# Altium PCB MiniHeating.PcbDoc
Units mil, origin at the board's own origin, x right, y up, seen from the top; angles counter-clockwise.
Board outline 2165.35 x 1732.28 mil, 2 copper layers (Top Layer, Bottom Layer); 63 components, 63 nets, 241 pads, 65 vias.
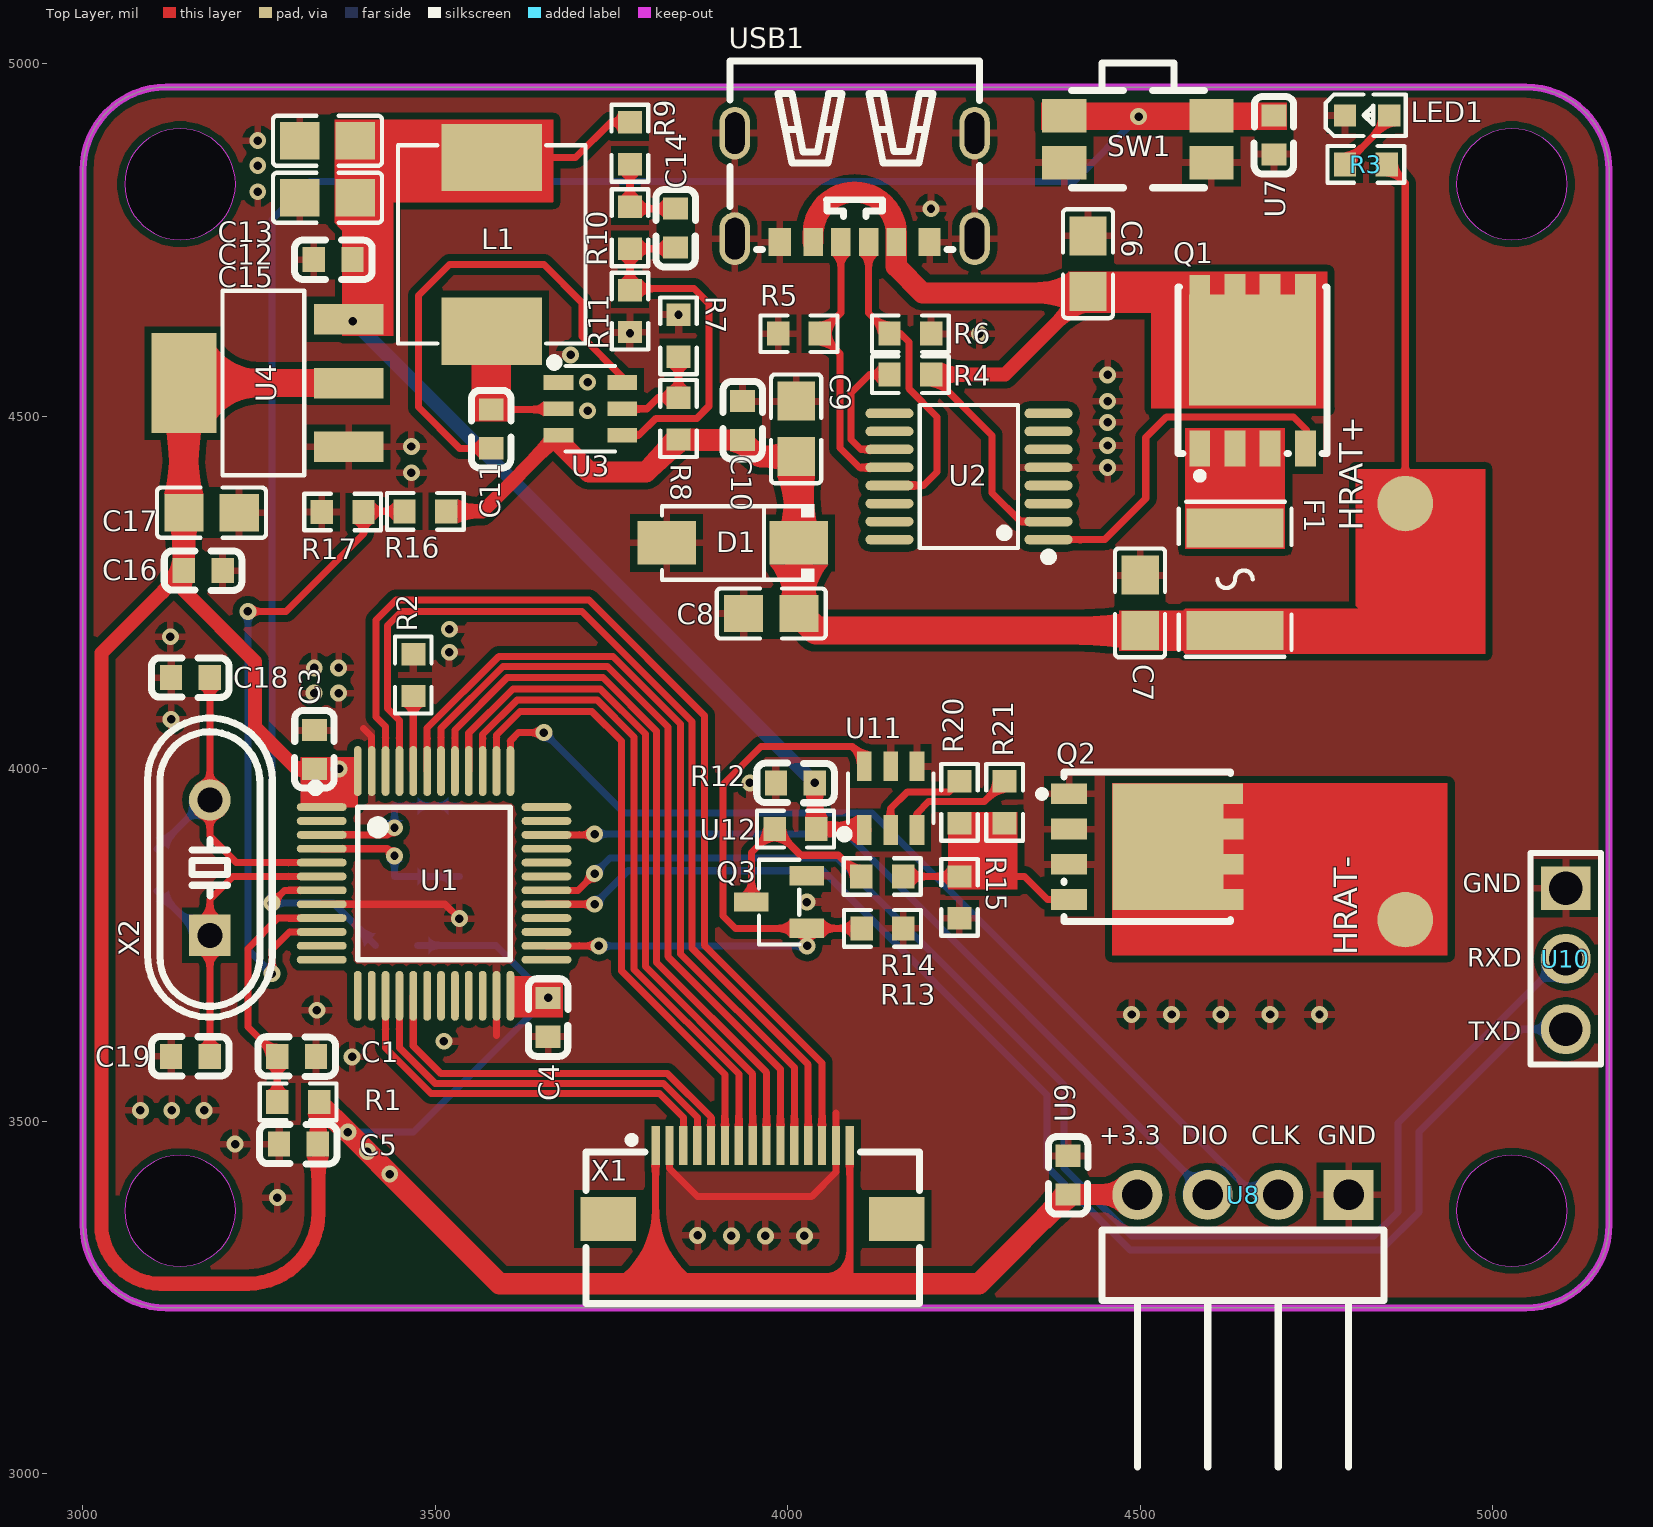
[diagram p0: Top Layer view]
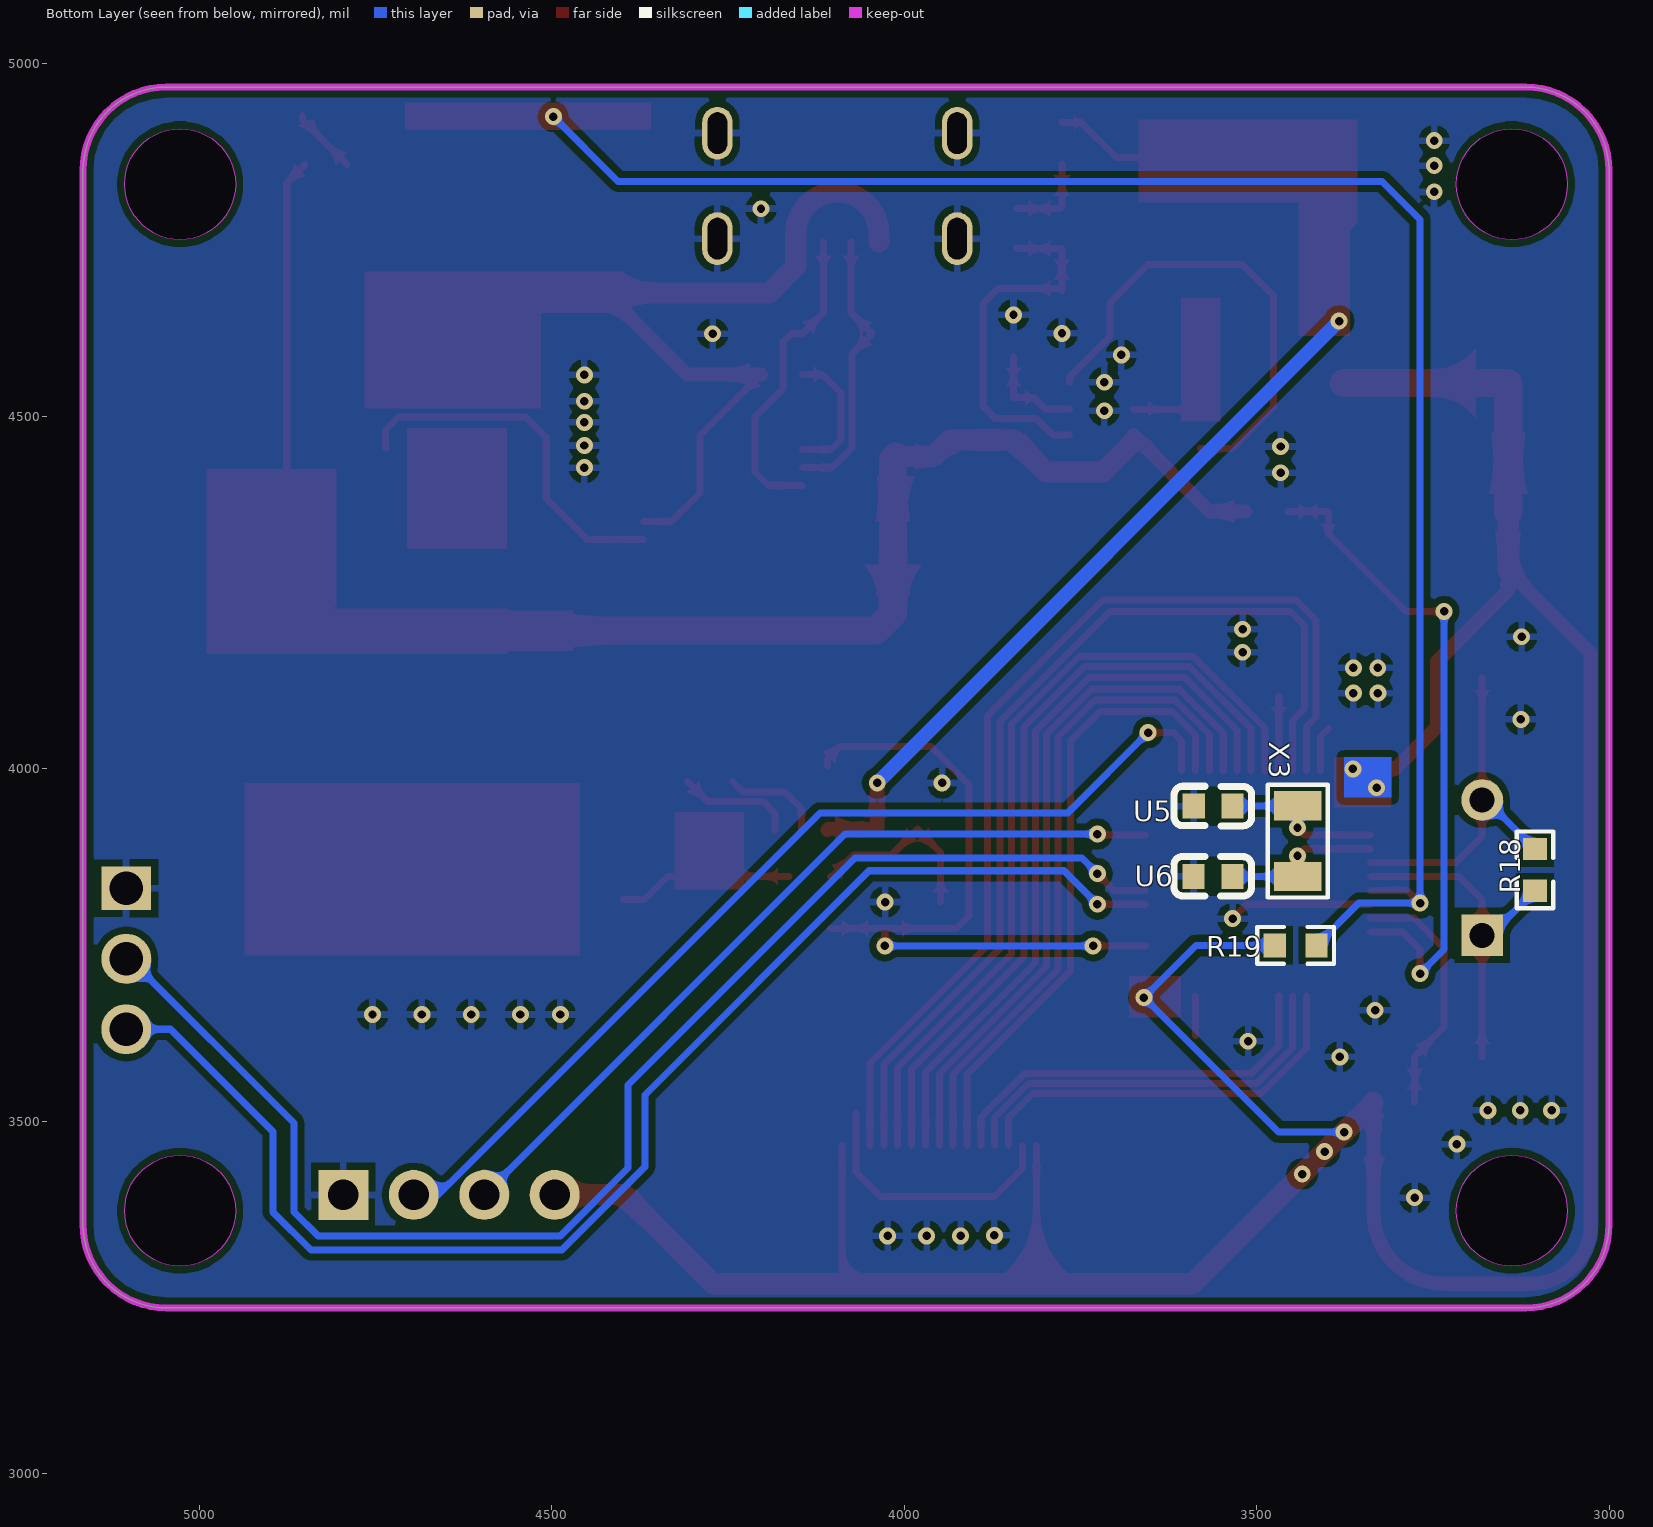
[diagram p1: Bottom Layer view, seen from below]

## Layer stack, top to bottom
Top Solder Mask Layer: solder mask 0.4, Solder Resist, Dk 3.5
Top Layer: signal copper 1.4
Dielectric1: dielectric 12.6, FR-4, Dk 4.8
Bottom Layer: signal copper 1.4
Bottom Solder Mask Layer: solder mask 0.4, Solder Resist, Dk 3.5

## Board outline
3000,3353.1 3000,4849.17 cw(c3118.11,4849.17) 3118.11,4967.28 5047.24,4967.28 cw(c5047.24,4849.17) 5165.35,4849.17 5165.35,3353.1 cw(c5047.24,3353.1) 5047.24,3234.99 3118.11,3234.99 cw(c3118.11,3353.1)
cut-out: 3216.54,4829.48 ccw(c3137.8,4829.48) 3059.06,4829.48 ccw(c3137.8,4829.48) 3216.54,4829.48
cut-out: 5106.3,4829.48 ccw(c5027.56,4829.48) 4948.82,4829.48 ccw(c5027.56,4829.48) 5106.3,4829.48
cut-out: 3216.54,3372.79 ccw(c3137.8,3372.79) 3059.06,3372.79 ccw(c3137.8,3372.79) 3216.54,3372.79
cut-out: 5106.3,3372.79 ccw(c5027.56,3372.79) 4948.82,3372.79 ccw(c5027.56,3372.79) 5106.3,3372.79

## Design rules (kind name [scope] priority, off if disabled: settings)
Clearance [All] p1: gap=10 ignorepadtopadclearanceinfootprint=FALSE except(0: Arc-Hole Track-Hole SMDPad-Hole THPad-Hole Via-Hole Fill-Hole Poly-Hole Region-Hole Text-Hole)
PolygonConnect [All] p1: connectstyle=Relief reliefconductorwidth=10 reliefentries=4 polygonreliefangle="90 Angle" airgapwidth=10
RoutingVias [All] p1: holewidth=28 width=50 viastyle="Through Hole" minholewidth=28 minwidth=50 maxholewidth=28 maxwidth=50
SolderMaskExpansion [All] p1: expansion=4 istentingtop=FALSE
Width [All] p1: maxlimit=10 minlimit=10 preferedwidth=10
30 further rules are at their usual default settings.

## Components (designator, comment, footprint, x,y, rotation, side; value= is the part's Value field where it differs from the comment)
C1 "CC0603KRX7R9BB104" C0603 3303.13,3591.78 r180 top
C3 "CC0603KRX7R9BB104" C0603 3328.23,4027.28 r270 top
C4 "CC0603KRX7R9BB104" C0603 3660.11,3647.28 r90 top
C5 "CC0603KRX7R9BB104" C0603 3305.67,3467.28 r0 top
C6 "10uF_C15415" C0805 4426.05,4716.65 r270 top
C7 "GRT21BC71E106KE13L" C0805 4499.92,4235.37 r270 top
C8 "GRT21BC71E106KE13L" C0805 3976.57,4220.28 r0 top
C9 "GRT21BC71E106KE13L" C0805 4012.01,4482.28 r270 top
C10 "0603BB104K500NGT" C0603 3936,4494.08 r270 top
C11 "0603BB104K500NGT" C0603 3579.29,4482.21 r90 top
C12 "GRT21BC71E106KE13L" C0805 3346.99,4810.22 r180 top
C13 "GRT21BC71E106KE13L" C0805 3346.99,4891.05 r180 top
C14 "0603BB104K500NGT" C0603 3841.05,4767.28 r90 top
C15 "0603BB104K500NGT" C0603 3355,4722.28 r180 top
C16 "0603BB104K500NGT" C0603 3170.63,4281.06 r0 top
C17 "GRT21BC71E106KE13L" C0805 3182.44,4363.33 r0 top
C18 "CGA3E2C0G1H060DT0Y0N" C0603 3152.44,4129.28 r0 top
C19 "CGA3E2C0G1H060DT0Y0N" C0603 3152.44,3591.78 r0 top
D1 "SZ1SMA26AT3G" SMA_L4.3-W2.6-LS5.2-FD 3921.99,4320.38 r0 top
F1 "FSMD075-33R" F1812 4634.7,4268.91 r270 top
L1 "FXL0630-150-M" IND-SMD_L7.0-W6.6_FXL0630 3580,4744.06 r270 top
LED1 "KT-0603R" LED0603-RD 4822.08,4926.97 r0 top
Q1 "BSC123N08NS3 G" PG-TDSON-8_L5.0-W6.0-P1.27-BL-EP 4659.49,4565.28 r0 top
Q2 "BSC123N08NS3 G" PG-TDSON-8_L5.0-W6.0-P1.27-BL-EP 4510.31,3889.44 r270 top
Q3 "SS8050_C2150" SOT-23-3_L2.9-W1.3-P1.90-LS2.4-BR 3987.75,3810.89 r0 top
R1 "0603WAF4703T5E" R0603 3305.37,3527.28 r180 top
R2 "0603WAF2402T5E" R0603 3468.66,4132.94 r90 top
R3 "RNCS0603BKE10K0" R0603 4820.4,4857.53 r180 top
R4 "AC0603DR-0710KL" R0603 4174,4617.28 r0 top
R5 "AC0603DR-0710KL" R0603 4016,4617.28 r180 top
R6 "HoLTT0805-1/8W-100K-5%" R0603 4174,4559.28 r0 top
R7 "AC0603FR-07105KL" R0603 3845,4614.3 r270 top
R8 "AC0603FR-07105KL" R0603 3845,4496.89 r270 top
R9 "AR03BTC5002A" R0603 3775.99,4887.48 r90 top
R10 "AR03BTC5002A" R0603 3776.18,4767.58 r90 top
R11 "AR03BTC5002A" R0603 3776.18,4649.31 r90 top
R12 "0603WAF4703T5E" R0603 4011.05,3914.39 r0 top
R13 "0603WAF4703T5E" R0603 4134.47,3773.49 r180 top
R14 "0603WAF4703T5E" R0603 4134.13,3847.12 r180 top
R15 "0603WAF4703T5E" R0603 4243.69,3817.45 r270 top
R16 "0603WAF4703T5E" R0603 3485.91,4365.28 r0 top
R17 "0603WAF4703T5E" R0603 3368.39,4364.28 r0 top
R18 "0603WAF1004T5E" R0603 3105,3856.49 r90 bottom
R19 "0603WAF1004T5E" R0603 3444.74,3749.28 r0 bottom
R20 "0603WAF4703T5E" R0603 4243.69,3952.39 r90 top
R21 "0603WAF4703T5E" R0603 4307.7,3952.39 r90 top
SW1 "TS-1186D-C-A" SW-SMD_TS-1186D-C-A 4496.9,4893.28 r180 top
U1 "CW32F030C8T6_C3019113" LQFP-48_L7.0-W7.0-P0.50-LS9.0-TL 3498.18,3837.28 r0 top
U2 "IP2721" TSSOP-16_L5.0-W4.4-P0.65-LS6.4-BL 4257.16,4414.71 r90 top
U3 "TPS54202DDCR" SOT-23-6_L2.9-W1.6-P0.95-LS2.8-BL 3720,4510.77 r270 top
U4 "LM1117GS-3.3" SOT-223-3_L6.5-W3.4-P2.30-LS7.0-BR 3260,4547.28 r0 top
U5 "C1608C0G1H090D080AA" C0603 3561.73,3946.97 r180 bottom
U6 "C1608C0G1H090D080AA" C0603 3562,3847.36 r180 bottom
U7 "C1608C0G1H090D080AA" C0603 4690,4899.28 r90 top
U8 "ZX-PZ2.54-1-4PWZ" HDR-TH_4P-P2.54-H-M-W10.3 4646,3395.28 r180 top
U9 "C1608C0G1H090D080AA" C0603 4397.87,3423.28 r90 top
U10 "ZX-PZ2.54-1-3PZZ" HDR-TH_3P-P2.54-V-M-1 5104,3730.37 r270 top
U11 "UCC27511DBVR" SOT-23-6_L2.9-W1.6-P0.95-LS2.8-BL 4146.07,3958.39 r0 top
U12 "C1608C0G1H090D080AA" C0603 4010.78,3979.89 r180 top
USB1 "TYPE-C-6P-DIP2X2" TYPE-C-SMD_TYPE-C-6P 4095,4824.62 r180 top
X1 "AFC01-S15FCA-00" FPC-SMD_15P-P0.50_JS_AFC01-S15FCA-00 3950.3,3413.28 r0 top
X2 "TAXD8M2GLFBET2T" HC-49US_L11.5-W4.5-P4.88 3180,3859.7 r90 top
X3 "SF32WK32768D31T002" OSC-SMD_L3.2-W1.5 3441.73,3897.28 r270 bottom

## Footprints (in the part's own frame and the unit in brackets; to place one, negate y for a bottom-side part, rotate by r counter-clockwise, add the part's x,y. Pads: shape width x height; smd on the part's side, far side on the other; paste and mask are expansions set on the pad)
C0603 [mm]
  rect 0.8x0.9 smd mask+0.051: 1(-0.7,0) 2(0.7,0)
  silkscreen extent -1.41,-0.71 1.39,0.72
C0805 [mm]
  rect 1.41x1.35 smd paste-100 mask+0.051: 1(-1,0) 2(1,0)
  silkscreen extent -1.96,-0.9 1.96,0.9
F1812 [mil]
  rect 55.38x137.76 smd paste-3937.01 mask+2: 1(-72.97,0) 2(72.97,0)
  silkscreen extent -110,-80 110,80
FPC-SMD_15P-P0.50_JS_AFC01-S15FCA-00 [mm]
  rect 0.3x1.4 smd paste+0 mask+0.05: 1(-3.5,1.325) 2(-3,1.325) 3(-2.5,1.325) 4(-2,1.325) 5(-1.5,1.325) 6(-1,1.325) 7(-0.5,1.325) 8(0,1.325) 9(0.5,1.325) 10(1,1.325) 11(1.5,1.325) 12(2,1.325) 13(2.5,1.325) 14(3,1.325) 15(3.5,1.325)
  rect 2x1.6 smd mask+0.051: 16(5.2,-1.325) 17(-5.2,-1.325)
  silkscreen extent -6.01,-4.37 6.01,1.65
HC-49US_L11.5-W4.5-P4.88 [mm]
  rect 1.5x1.5 hole 0.9 mask+0.051: 1(-2.44,0)
  round 1.5 hole 0.9 mask+0.051: 2(2.44,0)
  silkscreen extent -5.39,-2.25 5.39,2.25
HDR-TH_3P-P2.54-V-M-1 [mm]
  rect 1.575x1.8 hole 1.2 mask+0.051: 1(-2.54,0)
  round 1.8 hole 1.2 mask+0.051: 2(0,0) 3(2.54,0)
  silkscreen extent -3.81,-1.27 3.81,1.27
HDR-TH_4P-P2.54-H-M-W10.3 [mm]
  rect 1.8x1.8 hole 1.1 mask+0.051: 1(-3.81,0)
  round 1.8 hole 1.1 mask+0.051: 2(-1.27,0) 3(1.27,0) 4(3.81,0)
  silkscreen extent -5.08,1.27 5.08,9.81
IND-SMD_L7.0-W6.6_FXL0630 [mm]
  rect 2.424x3.62 smd mask+0.051: 1(3.128,0) 2(-3.128,0)
  silkscreen extent -3.58,-3.38 3.58,3.38
LED0603-RD [mm]
  rect 0.8x0.8 smd mask+0.051: 1(-0.799,-0.003) 2(0.799,0.003)
  silkscreen extent -1.49,-0.75 1.39,0.76
LQFP-48_L7.0-W7.0-P0.50-LS9.0-TL [mm]
  oval 1.8x0.28 smd mask+0.051: 1(-4.05,2.75) 2(-4.05,2.25) 3(-4.05,1.75) 4(-4.05,1.25) 5(-4.05,0.75) 6(-4.05,0.25) 7(-4.05,-0.25) 8(-4.05,-0.75) 9(-4.05,-1.25) 10(-4.05,-1.75) 11(-4.05,-2.25) 12(-4.05,-2.75) 25(4.05,-2.75) 26(4.05,-2.25) 27(4.05,-1.75) 28(4.05,-1.25) 29(4.05,-0.75) 30(4.05,-0.25) 31(4.05,0.25) 32(4.05,0.75) 33(4.05,1.25) 34(4.05,1.75) 35(4.05,2.25) 36(4.05,2.75)
  oval 0.28x1.8 smd mask+0.051: 13(-2.75,-4.05) 14(-2.25,-4.05) 15(-1.75,-4.05) 16(-1.25,-4.05) 17(-0.75,-4.05) 18(-0.25,-4.05) 19(0.25,-4.05) 20(0.75,-4.05) 21(1.25,-4.05) 22(1.75,-4.05) 23(2.25,-4.05) 24(2.75,-4.05) 37(2.75,4.05) 38(2.25,4.05) 39(1.75,4.05) 40(1.25,4.05) 41(0.75,4.05) 42(0.25,4.05) 43(-0.25,4.05) 44(-0.75,4.05) 45(-1.25,4.05) 46(-1.75,4.05) 47(-2.25,4.05) 48(-2.75,4.05)
  silkscreen extent -4.42,-2.75 2.75,3.6
OSC-SMD_L3.2-W1.5 [mm]
  rect 1.05x1.7 smd mask+0.051: 1(-1.275,0) 2(1.275,0)
  silkscreen extent -2.03,-1.08 2.03,1.08
PG-TDSON-8_L5.0-W6.0-P1.27-BL-EP [mil]
  rect 29.5x51.2 smd paste-3937.01 mask+2: 1(-75,-111) 2(-25,-111) 3(25,-111) 4(75,-111) 5(75,111) 6(25,111) 7(-25,111) 8(-75,110)
  rect 179.53x157.48 smd paste-3937.01 mask+2: 8(0,29)
  silkscreen extent -106,-154 106,118
R0603 [mil]
  rect 31.75x34.02 smd paste-3937.01 mask+2: 1(-29.66,0) 2(29.66,0)
  silkscreen extent -55,-26 55,26
SMA_L4.3-W2.6-LS5.2-FD [mil]
  rect 82.97x61.65 smd paste+0 mask+2: 1(-93.95,0) 2(93.95,0)
  silkscreen extent -100,-55 115,55
SOT-23-3_L2.9-W1.3-P1.90-LS2.4-BR [mm]
  rect 1.25x0.7 smd mask+0.051: 1(1,-0.95) 2(1,0.95) 3(-1,0)
  silkscreen extent -0.73,-1.53 0.73,1.53
SOT-23-6_L2.9-W1.6-P0.95-LS2.8-BL [mil]
  rect 20.95x42.2 smd mask+2: 1(-37.4,-45.24) 2(0,-45.24) 3(37.4,-45.24) 4(37.4,45.24) 5(0,45.24) 6(-37.4,45.24)
  silkscreen extent -72,-57 61,35
SOT-223-3_L6.5-W3.4-P2.30-LS7.0-BR [mm]
  rect 2.5x1.1 smd mask+0.051: 1(2.97,-2.3) 2(2.97,0) 3(2.97,2.3)
  rect 2.34x3.6 smd mask+0.051: 4(-2.97,0)
  silkscreen extent -1.57,-3.33 1.37,3.33
SW-SMD_TS-1186D-C-A [mm]
  rect 1.6x1.2 smd mask+0.051: 1(-2.65,0.85) 2(2.65,0.85) 3(-2.65,-0.85) 4(2.65,-0.85)
  silkscreen extent -2.4,-2.75 2.4,1.75
TSSOP-16_L5.0-W4.4-P0.65-LS6.4-BL [mil]
  oval 13.5x68.17 smd mask+2: 1(-89.57,-112.82) 2(-63.98,-112.82) 3(-38.39,-112.82) 4(-12.79,-112.82) 5(12.8,-112.82) 6(38.39,-112.82) 7(63.98,-112.82) 8(89.57,-112.82) 9(89.57,112.82) 10(63.98,112.82) 11(38.39,112.82) 12(12.8,112.82) 13(-12.79,112.82) 14(-38.39,112.82) 15(-63.98,112.82) 16(-89.57,112.82)
  silkscreen extent -120,-119 101,70
TYPE-C-SMD_TYPE-C-6P [mm]
  oval 1.1x1.9 hole 0.7 slot 1.5 at 90 deg mask+0.051: 7(-4.32,-1.963) 7(-4.32,1.838) 7(4.32,-1.963) 7(4.32,1.838)
  rect 0.7x1 smd paste-100 mask+0.051: A5(-0.5,1.963) A9(1.5,1.963) B5(0.5,1.963) B9(-1.5,1.963)
  rect 0.8x1 smd paste-100 mask+0.051: A12(2.7,1.963) B12(-2.7,1.963)
  silkscreen extent -4.5,-4.56 4.5,2.24

## Free pads (board coordinates)
  round 78.74 smd mask+2: 1(4876.23,3785.77) 2(4876.23,4376.32)

## Via types
v1: diameter 24.02, hole 12.01, Top Layer to Bottom Layer, 41 vias
v2: diameter 24, hole 12, Top Layer to Bottom Layer, 24 vias

## Nets (pads, with @x,y where several pads share a name; then routed paths per layer and width w, separated by ;. In a path a pad name is that pad's centre, name@x,y a point inside that pad or via, vN(x,y) a via of type N, cw(c..) or ccw(c..) an arc to the next point about the centre after c; other vN are vias at no path point)
$1N1025: C1.2 R1.2 U1.9 | length 357.7
  Top Layer w10: R1.2 3275.71,3591.64 C1.2 3234,3633.35 3234,3745.15 3276.92,3788.07 U1.9
$1N1218: R2.1 U1.44 | length 106.5
  Top Layer w10: U1.44 R2.1
$1N2533: Q1.4 U2.1 | length 523.8
  Top Layer w10: U2.1 4449.86,4325.14 4508,4383.28 4508,4470.1 4537.17,4499.28 4717.55,4499.28 4736,4480.83 4736,4455.79 Q1.4
$1N2629: F1.1 Q1.1 Q1.2 Q1.3
$1N2854: LED1.2 R3.2 | length 95.6
  Top Layer w10: R3.2 4853.56,4920.36 LED1.2
$1N3077: R6.1 U2.11 | length 191.3
  Top Layer w10: U2.11 4104.18,4453.1 4090,4467.28 4090,4533.28 4116,4559.28 R6.1
$1N4561: R7.2 R8.1 U3.5 | length 144.4
  Top Layer w10: U3.5 3800.5,4510.77 3816.27,4526.55 R8.1 R7.2
$1N4613: C11.1 U3.6 | length 695
  Top Layer w10: C11.1 3534.62,4454.65 3476,4513.28 3476,4671.28 3520,4715.28 3654,4715.28 3708,4661.28 3708,4613.28 3765.24,4556.04 U3.6
$1N4770: C11.2 L1.1 U3.2 | length 95.9
  Top Layer w10: C11.2 3673.76,4509.77 U3.2
$1N5062: C14.2 R9.1 R10.2 | length 126.5
  Top Layer w10: R9.1 3776.18,4857.63 R10.2 3778.58,4794.84 C14.2
$1N5071: C14.1 R10.1 R11.2 U3.4 | length 530.4
  Top Layer w10: U3.4 3789.1,4473.37 3813,4497.28 3871,4497.28 3888,4514.28 3888,4660.28 3867,4681.28 R11.2@3778.49,4681.28 ; R11.2 R11.2@3778.49,4681.28 ; C14.1 3839.26,4737.92 R10.1 3776.18,4683.59 R11.2@3778.49,4681.28
$1N6594: Q3.3 R12.1 R14.2 | length 268.1
  Top Layer w10: Q3.3 3948.38,3881.38 R12.1 4018.5,3877.28 4072,3877.28 4102.16,3847.12 R14.2
$1N12749: R20.2 U11.2 | length 143.8
  Top Layer w10: U11.2 4146.07,3943.35 4170,3967.28 4228.92,3967.28 R20.2
$1N12752: R21.2 U11.3 | length 166.6
  Top Layer w10: U11.3 4183.47,3936.75 4200,3953.28 4278.93,3953.28 R21.2
+3.3V: C3.2 C4.2 C5.2 C16.1 C17.1 R1.1 R19.2 U1.1 U1.24 U1.48 U4.2 U4.4 U8.4 U9.1 X1.1 X1.15 | length 4715
  Top Layer w10: C5.2 C5.2@3334,3467.28 ; X1.1 3812.5,3269.44 3812.67,3269.28 ; X1.15 4088.09,3273.94 4092.76,3269.28
  Top Layer w20: C3.2 3303.56,3999.72 3244,4059.28 3244,4151.85 3143.07,4252.78 C16.1 3026,4163.99 3026,3353.28 ccw(c3110,3353.28) 3110,3269.28 3234,3269.28 ccw(c3234,3369.28) 3334,3369.28 3334,3467.28 R1.1@3334,3526.25
  Top Layer w30: C16.1 C17.1 ; R1.1 3335.03,3525.22 v1(3375.78,3484.47) v1(3403.58,3456.67) v1(3435.32,3424.93) 3590.97,3269.28 3812.67,3269.28 4092.76,3269.28 4271.43,3269.28 U9.1 4495.56,3395.72 U8.4
  Top Layer w40: C17.1 U4.4 U4.2
  Bottom Layer w10: v1(3375.78,3484.47) 3469.19,3484.47 v1(3660,3675.28) 3586,3749.28 R19.2
  other v1: 3329.88,3973.03 3363.54,3999.72
+5V: C12.1 C13.1 C15.1 L1.2 R9.2 R12.2 U4.3 U11.1 U12.1 | length 1279.3
  Top Layer w10: L1.2@3580.07,4867.28 3699,4867.28 3748.87,4917.14 R9.2
  Top Layer w20: v1(4038.34,3979.89) 4038.34,3916.75 R12.2 4107.43,3914.39 U11.1
  Bottom Layer w20: v1@3382,4635.28 v1(3382.95,4635.28) v1(4038.34,3979.89)
+20V: C7.2 C8.2 C9.2 C10.2 D1.2 F1.2 pad.2 R3.1 R8.2 R16.2 U3.3 | length 1798.6
  Top Layer w10: R3.1 4876.23,4831.36 pad.2
  Top Layer w20: R16.2 3566.66,4365.28 U3.3
  Top Layer w30: U3.3@3674.76,4464.52 3718,4421.28 3799.05,4421.28 R8.2 3845.7,4466.52 C10.2 3959.62,4442.91 C9.2
  Top Layer w40: C9.2 4015.94,4438.98 D1.2 C8.2 4040.22,4196 C7.2
CC1: R4.1 U2.13 USB1.A5 | length 451.2
  Top Layer w10: USB1.A5 4114.69,4646.93 R4.1 4160,4617.28 4172,4605.28 4172,4539.28 4212,4499.28 4212,4421.28 4192.64,4401.92 U2.13
CC2: R5.1 U2.12 USB1.B5 | length 398.1
  Top Layer w10: USB1.B5 4075.32,4646.93 R5.1 4074,4588.94 4074,4455.28 4102,4427.28 4144.11,4427.28 U2.12
EC11_A: U1.45 X1.12 | length 1388.7
  Top Layer w10: U1.45 3448.97,4068.3 3432,4085.28 3432,4203.28 3452,4223.28 3708,4223.28 3864,4067.28 3864,3745.28 4029.03,3580.24 X1.12
EC11_B: U1.46 X1.13 | length 1444.5
  Top Layer w10: U1.46 3429.28,4059.99 3416,4073.28 3416,4211.28 3444,4239.28 3718,4239.28 3882,4075.28 3882,3749.28 4048.72,3582.55 X1.13
EC11_KEY: U1.43 X1.11 | length 1167.1
  Top Layer w10: U1.43 3488.34,4057.62 3590,4159.28 3752,4159.28 3848,4063.28 3848,3737.28 4009.35,3575.92 X1.11
GND: C1.1 C3.1 C4.1 C5.1 C6.1 C7.1 C8.1 C9.1 C10.1 C12.2 C13.2 C15.2 C16.2 C17.2 C18.1 C19.1 D1.1 LED1.1 Q2.1 Q2.2 Q2.3 Q3.2 R2.2 R4.2 R5.2 R7.1 R11.1 R13.1 R15.2 R17.1 SW1.1 SW1.2 U1.8 U1.23 U1.47 U2.5 U3.1 U4.1 U5.1 U6.1 U7.1 U8.1 U9.2 U10.1 U11.4 U11.5 U12.2 USB1.7 USB1.A12 USB1.B12 X1.2 X1.14 | length 708.7
  Top Layer w10: U1.8 3513.53,3807.75 v1(3534,3787.28) ; 3398,4057.28 3409.61,4045.67 U1.47 ; 3586.76,3621.28 U1.23 ; X1.2 3832.18,3432.88 3871.79,3393.28 4034,3393.28 4068.4,3427.68 X1.14 4068.4,3511.28
  other v1: 3275.71,3391.37 3216,3467.28 3382,3591.28 3512,3613.28 3332,3657.28 4027.12,3810.89 3946.27,3979.9 3328,4107.28 3362.83,4107.28 3328.11,4143.15 3362.83,4143.15 3520,4165.28 3520,4197.9 4454,4427.28 4454,4458.65 4454,4491.42 4454,4521.5 4454,4558.76 4272,4617.28 4203.27,4794.61
  other v2: 3920,3337.28 3968.37,3337.28 4023.62,3337.28 3872,3337.98 3081.44,3515.28 3126,3515.28 3171.82,3515.28 4488,3651.28 4544.75,3651.28 4614.48,3651.28 4684.51,3651.28 4754.54,3651.28 3125.05,4069.93 3124,4187.28 3466,4420.02 3466,4457.28 3716.16,4507.96 3716.16,4548.36 3692,4587.28 3776.18,4617.81 3845,4643.96 3248,4818.75 3248,4855.79 3248,4891.28
HEAT_PWM: Q3.1 R13.2 U1.26 U11.6 | length 1025.9
  Top Layer w10: U1.26 v1(3732,3748.7) ; v1(4027.42,3748.7) 4027.42,3773.19 Q3.1 ; R13.2 Q3.1 ; U11.6 4108.67,4014.6 4091.85,4031.43 3962.15,4031.43 3908,3977.28 3908,3791.28 3925.79,3773.49 Q3.1
  Bottom Layer w10: v1(3732,3748.7) v1(4027.42,3748.7)
HRAT-: pad.1 Q2.5 Q2.6 Q2.7 Q2.8
K_CS: U1.17 X1.5 | length 575.9
  Top Layer w10: U1.17 3468.66,3606.42 3507.8,3567.28 3829.6,3567.28 3891.24,3505.63 X1.5
K_MISO: U1.16 X1.4 | length 577.6
  Top Layer w10: U1.16 3448.97,3604.1 3499.8,3553.28 3823.8,3553.28 3872,3505.07 3872,3465.89 X1.4
K_SCK: U1.15 X1.3 | length 577.3
  Top Layer w10: U1.15 3429.28,3603.99 3494,3539.28 3818,3539.28 3852,3505.28 3852,3465.57 X1.3
NMOS-G: Q2.4 R14.1 R15.1 R20.1 R21.1 | length 249.1
  Top Layer w10: R14.1 R15.1 4336.03,3847.12 4368.71,3814.44 Q2.4
NRST: R19.1 SW1.3 SW1.4 U1.7 U7.2 | length 2510.7
  Top Layer w10: v1(3268,3809.28) 3286.16,3827.44 U1.7
  Bottom Layer w10: R19.1 3355.08,3809.28 v1(3268,3809.28) 3268,4779.28 3322,4833.28 4406,4833.28 v1(4498,4925.28)
OLED_CLK: U1.38 X1.6 | length 894.4
  Top Layer w10: U1.38 3586.76,4048.04 3620,4081.28 3722,4081.28 3764,4039.28 3764,3713.28 3910.92,3566.35 X1.6
OLED_CS: U1.42 X1.10 | length 1114.7
  Top Layer w10: U1.42 3508.03,4057.48 3595.81,4145.26 3744.02,4145.26 3830,4059.28 3830,3733.28 3989.66,3573.61 X1.10
OLED_D/C: U1.41 X1.9 | length 1059.2
  Top Layer w10: U1.41 3527.72,4054.99 3602,4129.28 3738,4129.28 3814,4053.28 3814,3725.28 3969.98,3569.29 X1.9
OLED_RES: U1.40 X1.8 | length 1003.9
  Top Layer w10: U1.40 3547.39,4050.67 3610,4113.28 3734,4113.28 3798,4049.28 3798,3719.28 3950.29,3566.98 X1.8
OLED_SDA: U1.39 X1.7 | length 949.7
  Top Layer w10: U1.39 3567.09,4048.36 3616,4097.28 3730,4097.28 3782,4045.28 3782,3715.28 3930.61,3566.66 X1.7
PA0: R16.1 R17.2 U1.10 | length 942.4
  Top Layer w10: v1(3234,4223.28) 3288,4223.28 3398.05,4333.33 R17.2 3399.05,4365.28 R16.1 ; v1(3268,3709.28) 3268,3743.28 3293.1,3768.38 U1.10
  Bottom Layer w10: v1(3234,4223.28) 3234,3743.28 v1(3268,3709.28)
PA1: U1.11
PA2: U1.12
PA3: U1.13
PA4: U1.14
PA8: U1.29 U10.3 | length 1945.1
  Top Layer w10: U1.29 v1(3726,3807.75)
  Bottom Layer w10: v1(3726,3807.75) 3773.53,3855.28 4050,3855.28 4368,3537.28 4368,3435.28 4486,3317.28 4842,3317.28 4896,3371.28 4896,3485.28 5041.09,3630.37 U10.3
PA9: U1.30 U10.2 | length 1993.1
  Top Layer w10: U1.30 3702.16,3827.44 v1(3726,3851.28)
  Bottom Layer w10: v1(3726,3851.28) 3748,3873.28 4070,3873.28 4392,3551.28 4392,3433.28 4488,3337.28 4832,3337.28 4866,3371.28 4866,3497.28 5099.09,3730.37 U10.2
PA10: U1.31
PA11: U1.32
PA12: U1.33
PA13/SWDDIO: U1.34 U8.3 | length 1150.9
  Top Layer w10: U1.34 3724.9,3906.18 v1(3726,3907.28)
  Bottom Layer w10: v1(3726,3907.28) 4084,3907.28 U8.3
PA14/SWCLK: U1.37 U8.2 | length 1409.1
  Top Layer w10: U1.37 3606.45,4039.73 3618,4051.28 v1(3654,4051.28)
  Bottom Layer w10: v1(3654,4051.28) 3768,3937.28 4119.67,3937.28 4661.67,3395.28 U8.2
PB0: U1.18
PB1: U1.19
PB2: U1.20
PB10: U1.21
PB11: U1.22
PB12: U1.25
PB14: U1.27
PB15: U1.28
PC13: U1.2
PC14: U1.3 U5.2 X3.1 | length 231
  Top Layer w10: U1.3 3431.9,3906.18 v1(3442,3916.28)
  Bottom Layer w10: X3.1 X3.1@3442,3947.2 ; v1(3442,3916.28) X3.1@3442,3947.2 ; U5.2 3533.94,3947.2 X3.1@3442,3947.2
PC15: U1.4 U6.2 X3.2 | length 229.6
  Top Layer w10: U1.4 3431.79,3886.49 v1(3442,3876.28)
  Bottom Layer w10: v1(3442,3876.28) 3442,3847.35 X3.2 3534.15,3847.08 U6.2
PF0: C18.2 R18.2 U1.5 X2.2 | length 503.1
  Top Layer w10: C18.2 X2.2 3180,3904.28 3217.47,3866.81 U1.5
  Bottom Layer w10: R18.2 3174.61,3955.76 X2.2
PF1: C19.2 R18.1 U1.6 X2.1 | length 496
  Top Layer w10: C19.2 X2.1 3180,3814.28 3212.84,3847.12 U1.6
  Bottom Layer w10: R18.1 3168.2,3763.64 X2.1
PF6: U1.35
PF7: U1.36
VBUS: C6.2 Q1.5 Q1.6 Q1.7 Q1.8 R6.2 U2.2 USB1.A9 USB1.B9 | length 1101.3
  Top Layer w10: R6.2 4290,4472.94 4290,4391.28 4330.55,4350.73 U2.2
  Top Layer w20: R6.2 4308.05,4559.28 C6.2@4424.05,4675.28
  Top Layer w30: USB1.A9 4035.95,4759.22 cw(c4095,4759.22) 4095,4818.28 cw(c4095,4759.22) 4154.06,4759.22 USB1.B9 4154.06,4712.67 4191.45,4675.28 4424.05,4675.28 C6.2
pads on no net: U2.3 U2.4 U2.6 U2.7 U2.8 U2.9 U2.10 U2.14 U2.15 U2.16 X1.16 X1.17

## Polygon pours and split planes (outlines as drawn)
GND on Top Layer "Top Layer-GND" (solid, remove dead copper, pour order 0): 3000,3233.28 5168,3233.28 5168,4967.28 3000,4967.28
GND on Bottom Layer "Bottom Layer-GND" (solid, remove dead copper, pour order 1): 3000,3233.28 5168,3233.28 5168,4967.28 3000,4967.28

## Keep-outs
Board Outline Layer:
  the board outline again, w10

## Other copper
Top Layer:
  region net $1N4770: 3551.35,4493.25 3607.24,4493.25 3607.24,4667.28 3551.35,4667.28 3551.35,4493.25
  region net $1N2629: 4564,4312.29 4705.48,4312.29 4705.48,4483.28 4564,4483.28 4564,4312.29
  region net +20V: 4470.34,4167.28 4704,4167.28 4704,4224.04 4470.34,4224.04 4470.34,4167.28
  region net +3.3V: 3308.7,3945.54 3389.92,3945.54 3389.92,4016.03 3308.7,4016.03 3308.7,3945.54
  region net +3.3V: 3608,3647.28 3680.59,3647.28 3680.59,3705.28 3608,3705.28 3608,3647.28
  region net NRST: 4360,4906.96 4707.86,4906.96 4707.86,4945.28 4360,4945.28 4360,4906.96
  region net NMOS-G: 4227.94,3829.28 4326,3829.28 4326,3938.41 4227.94,3938.41 4227.94,3829.28
  region net HRAT-: 4460.57,3735.28 4936,3735.28 4936,3979.2 4460.57,3979.2 4460.57,3735.28
  region net +5V: 3357,4920.85 3357,4774.65 3365.37,4766.28 3368,4763.22 3368,4614.28 3440,4614.28 3440,4804.08 3666.8,4804.08 3667,4804.28 3667,4920.85 3357,4920.85
  region net VBUS: 4398,4705.28 4765.48,4705.28 4765.48,4511.79 4766,4511.28 4515.83,4511.28 4515.83,4647.28 4398,4647.28 4398,4705.28
  region net +20V: 4806,4425.28 4806,4231.28 4810,4227.28 4564,4227.28 4562,4225.28 4562,4165.28 4564,4163.28 4990,4163.28 4990,4425.26 4988,4425.28 4806,4425.28
Bottom Layer:
  region net +3.3V: 3308.7,3959.28 3376,3959.28 3376,4016.03 3308.7,4016.03 3308.7,3959.28

## Silkscreen, mask and mechanical layers (free items; w line width, h text height)
Top Silkscreen Layer:
  text "HRAT+" at 4827.55,4337.62 h56.64 r90
  text "GND" at 4958.05,3815.64 h45.31
  text "HRAT-" at 4819.79,3735.62 h56.64 r90
  text "RXD" at 4964.05,3709.64 h45.31
  text "TXD" at 4966.05,3605.64 h45.31
  text "+3.3" at 4442.16,3457.64 h45.31
  text "DIO" at 4558.05,3457.64 h45.31
  text "CLK" at 4658.05,3457.64 h45.31
  text "GND" at 4752.05,3457.64 h45.31
Mechanical Layer:
  circle w1: c3137.8,4829.48 r78.74
  circle w1: c5027.56,4829.48 r78.74
  circle w1: c3137.8,3372.79 r78.74
  circle w1: c5027.56,3372.79 r78.74